# Altium PCB PCB_Robo_Hand.PcbDoc
Units mil, origin at the board's own origin, x right, y up, seen from the top; angles counter-clockwise.
Board outline 3800 x 3700 mil, 2 copper layers (Top Layer, Bottom Layer), stack 65.792 mil thick; 20 components, 26 nets, 130 pads, 44 vias.
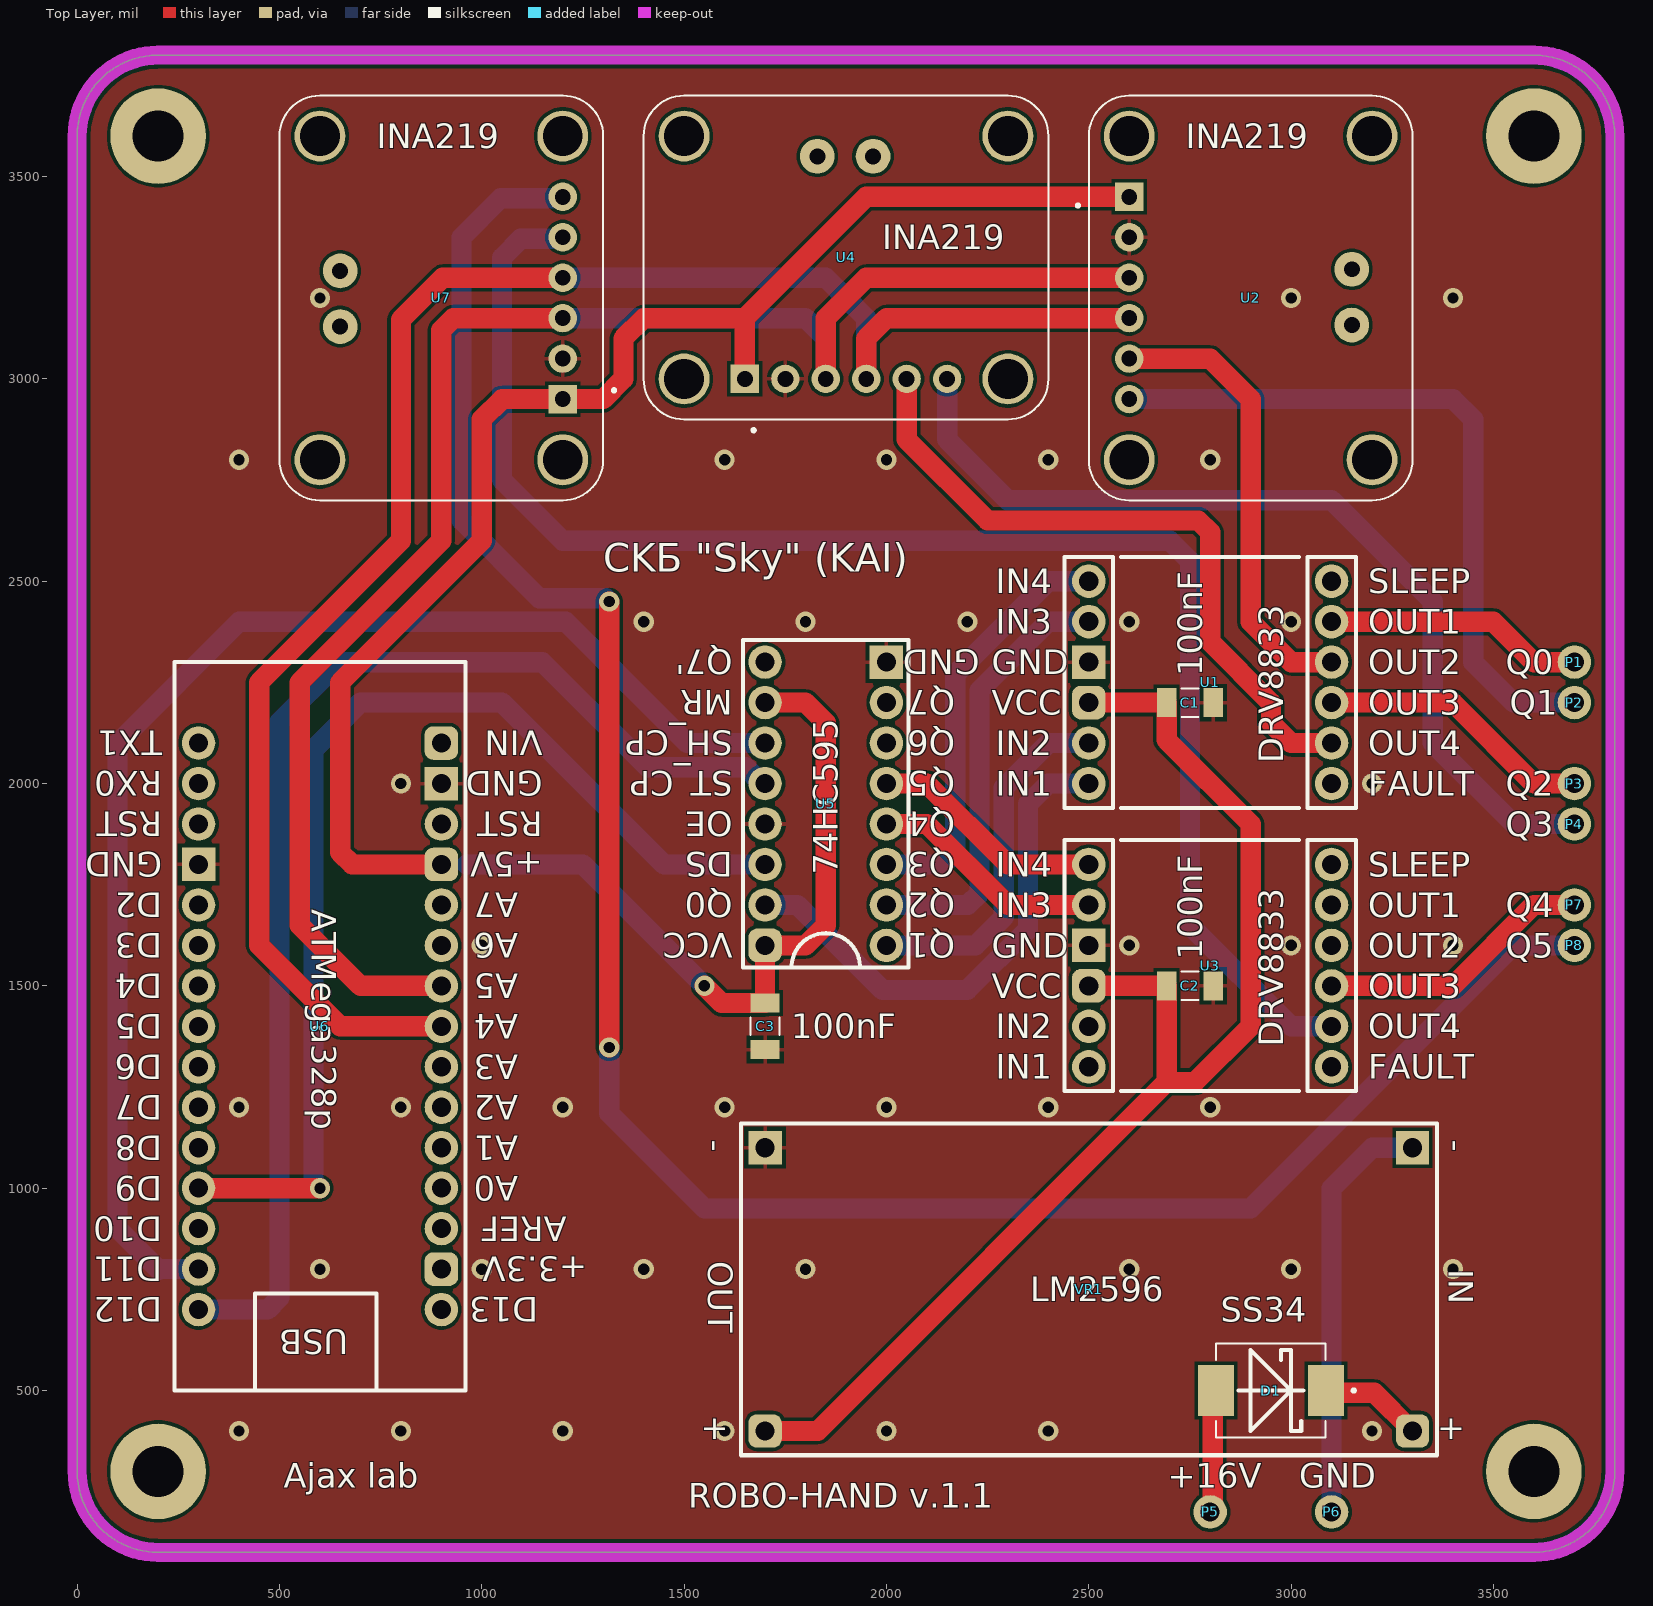
[diagram p0: Top Layer view]
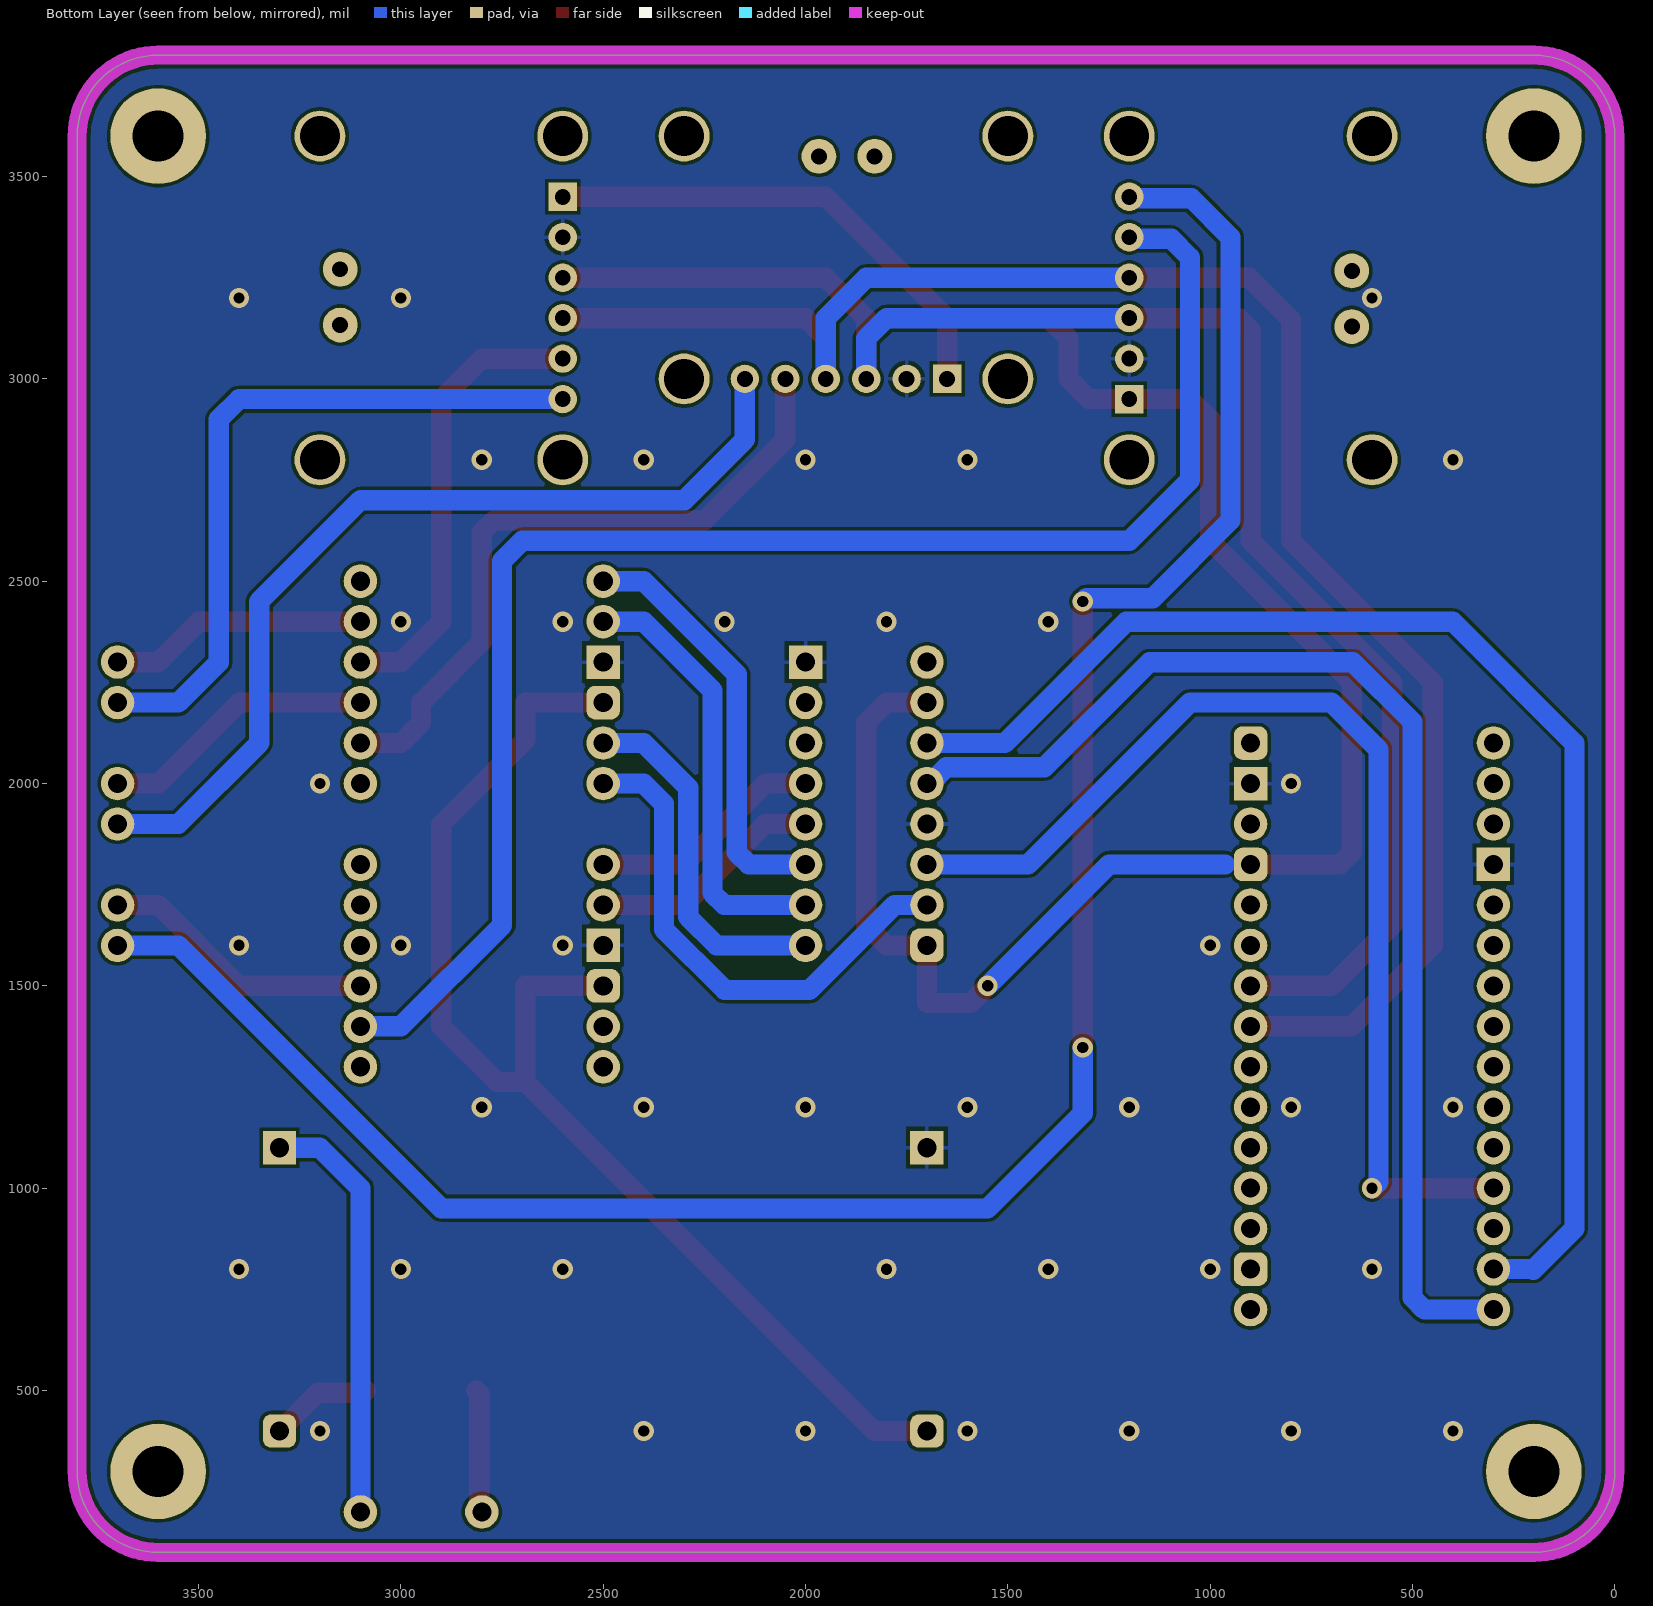
[diagram p1: Bottom Layer view, seen from below]
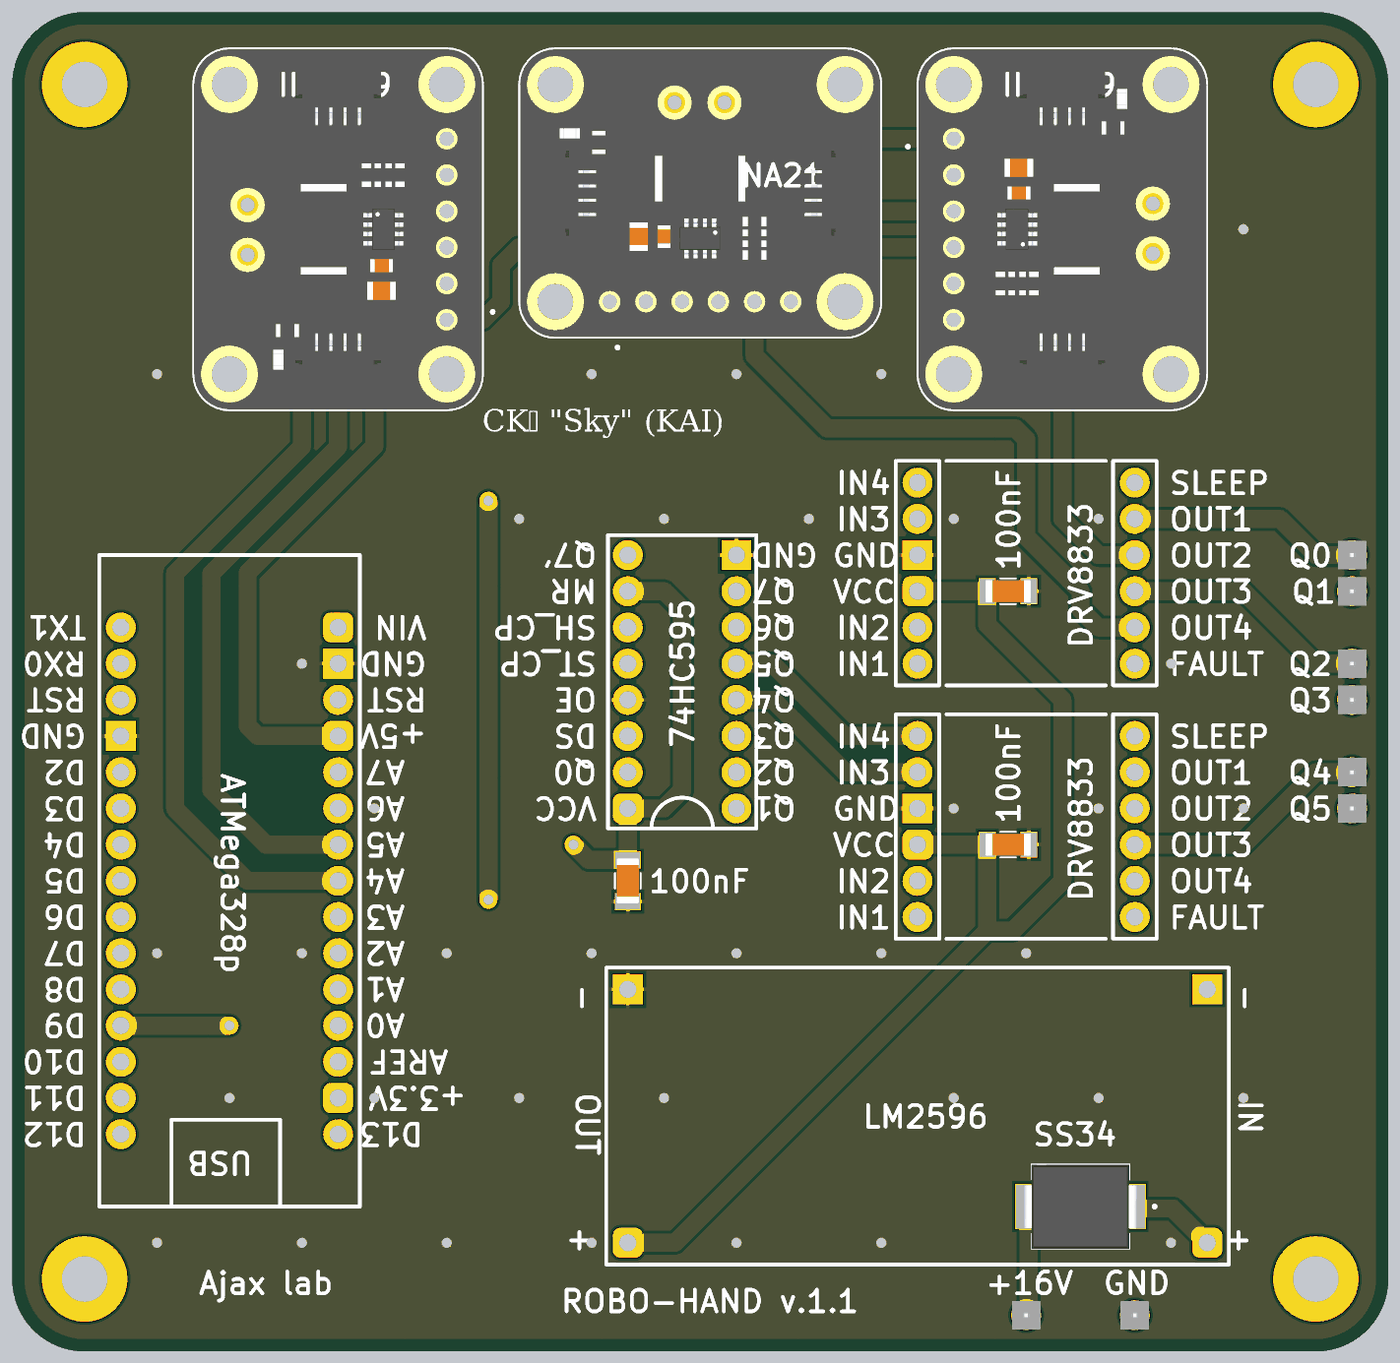
[diagram p2: 3D render of the assembled board from above, using the file's embedded part models]

## Layer stack, top to bottom
Top Solder: solder mask 0.4, Solder Resist, Dk 3.5
Top Layer: signal copper 1.4
Dielectric 1: dielectric 62.9921, FR-4, Dk 4.8
Bottom Layer: signal copper 1.4
Bottom Solder: solder mask 0.4, Solder Resist, Dk 3.5

## Board outline
0,300 0,3600 cw(c200,3600) 200,3800 3600,3800 cw(c3600,3600) 3800,3600 3800,300 cw(c3600,300) 3600,100 200,100 cw(c200,300)

## Design rules (kind name [scope] priority, off if disabled: settings)
AssemblyTestPointUsage [All] p1: isadvanced=TRUE
AssemblyTestpoint [All] p1: isadvanced=TRUE testpointundercomponent=TRUE minsize=40 maxsize=100 preferedsize=60 minholesize=0 maxholesize=40 preferedholesize=32 testpointgrid=1 usegrid=TRUE gridtolerance=0.01 allowsidetop=TRUE allowsidebottom=TRUE
Clearance Clearance_1 [OnMid vs OnMid] p1: gap=8 ignorepadtopadclearanceinfootprint=FALSE sourcerule=50 cellrowname=All cellrowtype=0 cellcolname=All cellcoltype=0 innerlayers=TRUE
Clearance Clearance_2 [(ExistsOnLayer('Top Layer') Or ExistsOnLayer('Bottom Layer')) vs (ExistsOnLayer('Top Layer') Or ExistsOnLayer('Bottom Layer'))] p2: gap=8 ignorepadtopadclearanceinfootprint=FALSE sourcerule=50 cellrowname=All cellrowtype=0 cellcolname=All cellcoltype=0 outerlayers=TRUE
Clearance [All] p3: gap=10 ignorepadtopadclearanceinfootprint=FALSE ismatrix=TRUE miname0="All Differential Pairs" mitype0=4
ComponentClearance ComponentClearance_1 [All] p1: isadvanced=TRUE gap=0 collisioncheckmode=3 verticalgap=10 showdistances=FALSE
FabricationTestPointUsage [All] p1: isadvanced=TRUE valid=0 allowmultiple=FALSE
FabricationTestpoint [All] p1: isadvanced=TRUE side=3 testpointundercomponent=TRUE minsize=40 maxsize=100 preferedsize=60 minholesize=0 maxholesize=40 preferedholesize=32 testpointgrid=1 allowsidetop=TRUE allowsidebottom=TRUE usegrid=TRUE gridtolerance=0.01
FanoutControl Fanout_BGA [IsBGA] p1: isadvanced=TRUE bgadir=Out bgaviamode=Centered fanoutstyle=Auto fanoutdirection=Alternating viagrid=1 // Fanout_BGA (Default Rule)
FanoutControl Fanout_LCC [IsLCC] p2: isadvanced=TRUE bgadir=Out bgaviamode=Centered fanoutstyle=Auto fanoutdirection=Alternating viagrid=1 // Fanout_LCC (Default Rule)
FanoutControl Fanout_SOIC [IsSOIC] p3: isadvanced=TRUE bgadir=Out bgaviamode=Centered fanoutstyle=Auto fanoutdirection=Alternating viagrid=1 // Fanout_SOIC (Default Rule)
FanoutControl Fanout_Small [(CompPinCount < 5)] p4: isadvanced=TRUE bgadir=Out bgaviamode=Centered fanoutstyle=Auto fanoutdirection=OutThenIn viagrid=1 // Fanout_Small (Default Rule)
FanoutControl Fanout_Default [All] p5: isadvanced=TRUE bgadir=Out bgaviamode=Centered fanoutstyle=Auto fanoutdirection=Alternating viagrid=1 // Fanout_Default (Default Rule)
Height [All] p1: isadvanced=TRUE minheight=0 maxheight=1000 prefheight=500
HoleSize [All] p1: isadvanced=TRUE absolutevalues=TRUE maxlimit=125.98 minlimit=1 maxpercent=80.000 minpercent=20.000
HoleToHoleClearance [All] p1: isadvanced=TRUE gap=10 allowstackedmicrovias=TRUE
LayerPairs [All] p1: isadvanced=TRUE enforce=TRUE
MinimumSolderMaskSliver [All] p1: isadvanced=TRUE minsoldermaskwidth=10
NetAntennae [All] p1: isadvanced=TRUE netantennaetolerance=0
PasteMaskExpansion [All] p1: isadvanced=TRUE expansion=-1.97
PlaneClearance [All] p1: isadvanced=TRUE clearance=20
PlaneConnect [All] p1: isadvanced=TRUE planeconnectstyle=Relief reliefexpansion=20 reliefentries=4 reliefconductorwidth=10 reliefairgap=20
PolygonConnect [All] p1: connectstyle=Relief reliefconductorwidth=10 reliefentries=4 polygonreliefangle="90 Angle" airgapwidth=10
RoutingCorners [All] p1: isadvanced=TRUE cornerstyle=45-Degree minsetback=100 maxsetback=100
RoutingPriority [All] p1: isadvanced=TRUE routingpriority=0
RoutingVias [All] p1: holewidth=28 width=50 viastyle="Through Hole" minholewidth=28 minwidth=50 maxholewidth=28 maxwidth=50
ShortCircuit [All] p1: isadvanced=TRUE allowed=FALSE
SilkToSilkClearance [All] p1: isadvanced=TRUE silktosilkclearance=5
SilkToSolderMaskClearance [IsPad] p1: isadvanced=TRUE minsilkscreentomaskgap=5 clearancetoexposedcopper=TRUE
SolderMaskExpansion [All] p1: isadvanced=TRUE expansion=3 istentingtop=FALSE
SupplyNets "Schematic Supply Nets_13" [InNet('SCL')] p1: isadvanced=TRUE voltage=0.000
SupplyNets "Schematic Supply Nets_12" [InNet('SDA')] p2: isadvanced=TRUE voltage=0.000
SupplyNets "Schematic Supply Nets_11" [InNet('+3V')] p3: isadvanced=TRUE voltage=0.000
SupplyNets "Schematic Supply Nets_10" [InNet('GND')] p4: isadvanced=TRUE voltage=0.000
SupplyNets "Schematic Supply Nets_9" [InNet('+5')] p5: isadvanced=TRUE voltage=0.000
SupplyNets "Schematic Supply Nets_8" [InNet('Q5')] p6: isadvanced=TRUE voltage=0.000
SupplyNets "Schematic Supply Nets_7" [InNet('SH_CP')] p7: isadvanced=TRUE voltage=0.000
SupplyNets "Schematic Supply Nets_6" [InNet('Q0')] p8: isadvanced=TRUE voltage=0.000
SupplyNets "Schematic Supply Nets_5" [InNet('Q3')] p9: isadvanced=TRUE voltage=0.000
SupplyNets "Schematic Supply Nets_4" [InNet('DS')] p10: isadvanced=TRUE voltage=0.000
SupplyNets "Schematic Supply Nets_3" [InNet('ST_CP')] p11: isadvanced=TRUE voltage=0.000
SupplyNets "Schematic Supply Nets_2" [InNet('Q1')] p12: isadvanced=TRUE voltage=0.000
SupplyNets "Schematic Supply Nets_1" [InNet('Q4')] p13: isadvanced=TRUE voltage=0.000
SupplyNets "Schematic Supply Nets" [InNet('Q2')] p14: isadvanced=TRUE voltage=0.000
UnRoutedNet [All] p1: isadvanced=TRUE
UnpouredPolygon [All] p1: isadvanced=TRUE
Width [All] p1 off: maxlimit=10 minlimit=10 preferedwidth=10
4 further rules are at their usual default settings.

## Classes and differential pairs
component class Sheet_Robo_Hand_main: C1 C2 C3 D1 P1 P3 P5 P6 P7 U1 U2 U3 U4 U5 U6 U7 VR1

## Components (designator, comment, footprint, x,y, rotation, side; value= is the part's Value field where it differs from the comment)
C1 "100nF" CAPC3216X180N 2750,2200 r180 top
C2 "100nF" CAPC3216X180N 2750,1500 r0 top
C3 "100nF" CAPC3216X180N 1700,1400 r90 top
D1 "SS34" DIOM7959X265N 2950,500 r180 top
P1 "Q0" PCB_Pin_1 3700,2300 r0 top
P2 "Q1" PCB_Pin_1 3700,2200 r0 top
P3 "Q2" PCB_Pin_1 3700,2000 r0 top
P4 "Q3" PCB_Pin_1 3700,1900 r0 top
P5 "+16V" PCB_Pin_1 2800,200 r0 top
P6 "GND" PCB_Pin_1 3100,200 r0 top
P7 "Q4" PCB_Pin_1 3700,1700 r0 top
P8 "Q5" PCB_Pin_1 3700,1600 r0 top
U1 "DRV8833" PCB_DRV8833 2400,1900 r0 top
U2 "INA219" MODULE_INA219 2900,3200 r270 top
U3 "DRV8833" PCB_DRV8833 2400,1200 r0 top
U4 "INA219" MODULE_INA219 1900,3300 r0 top
U5 "74HC595" PCB_74HC595_Footprint 2100,2400 r180 top
U6 "ATMega328p" PCB_ATMega328p 1000,2200 r180 top
U7 "INA219" MODULE_INA219 900,3200 r90 top
VR1 "LM2596" "DC-DC Step-Down Footprint" 3400,1200 r180 top

## Footprints (in the part's own frame and the unit in brackets; to place one, negate y for a bottom-side part, rotate by r counter-clockwise, add the part's x,y. Pads: shape width x height; smd on the part's side, far side on the other; paste and mask are expansions set on the pad)
CAPC3216X180N [mm]
  rect 1.2x1.82 smd: 1(-1.46,0) 2(1.46,0)
  silkscreen extent -0.54,-0.9 0.54,0.9, body extent -1.6,-0.8 1.6,0.8, height 1.8
"DC-DC Step-Down Footprint" [mm]
  rect 2.1x2.1 hole 1.2: 0(2.54,2.54) 3(43.18,2.54)
  rrect50% 2.1x2.1 hole 1.2: 1(2.54,20.32) 2(43.18,20.32)
  silkscreen extent 1.02,1.02 44.7,21.84
DIOM7959X265N [mm]
  rect 2.25x3.18 smd: A(3.455,0) C(-3.455,0)
  silkscreen extent -5.3,-2.95 3.44,2.95, body extent -3.98,-2.95 3.98,2.95, height 2.65
MODULE_INA219 [mm]
  rect 1.778x1.778 / inner round 1.778 / far side rect 1.778x1.778 hole 1: 1(-6.35,-7.62)
  round 1.778 hole 1: 2(-3.81,-7.62) 3(-1.27,-7.62) 4(1.27,-7.62) 5(3.81,-7.62) 6(6.35,-7.62)
  round 3.2 hole 2.5: SH1(-10.16,7.62) SH2(10.16,7.62) SH3(-10.16,-7.62) SH4(10.16,-7.62)
  round 2.184 hole 1: VIN+(1.7,6.35) VIN-(-1.8,6.35)
  silkscreen extent -12.7,-10.94 12.7,10.16, body extent -12.7,-10.16 12.7,10.16, height 2.95
PCB_74HC595_Footprint [mm]
  rect 2.1x2.1 hole 1.2: 0(2.54,2.54)
  round 2.1 hole 1.2: 1(2.54,5.08) 2(2.54,7.62) 3(2.54,10.16) 4(2.54,12.7) 5(2.54,15.24) 6(2.54,17.78) 7(2.54,20.32) 9(10.16,17.78) 10(10.16,15.24) 11(10.16,12.7) 12(10.16,10.16) 13(10.16,7.62) 14(10.16,5.08) 15(10.16,2.54)
  rrect50% 2.1x2.1 hole 1.2: 8(10.16,20.32)
  silkscreen extent 1.14,1.14 11.56,21.72
PCB_ATMega328p [mm] "Arduino Nano"
  rrect50% 2.1x2.1 hole 1.2: 0(2.54,2.54) 3(2.54,10.16) 13(2.54,35.56)
  rect 2.1x2.1 hole 1.2: 1(2.54,5.08) 26(17.78,10.16)
  round 2.1 hole 1.2: 2(2.54,7.62) 4(2.54,12.7) 5(2.54,15.24) 6(2.54,17.78) 7(2.54,20.32) 8(2.54,22.86) 9(2.54,25.4) 10(2.54,27.94) 11(2.54,30.48) 12(2.54,33.02) 14(2.54,38.1) 15(17.78,38.1) 16(17.78,35.56) 17(17.78,33.02) 18(17.78,30.48) 19(17.78,27.94) 20(17.78,25.4) 21(17.78,22.86) 22(17.78,20.32) 23(17.78,17.78) 24(17.78,15.24) 25(17.78,12.7) 27(17.78,7.62) 28(17.78,5.08) 29(17.78,2.54)
  silkscreen extent 1.02,-2.54 19.3,43.18
PCB_DRV8833 [mm]
  round 2.1 hole 1.2: 0(2.54,2.54) 1(2.54,5.08) 4(2.54,12.7) 5(2.54,15.24) 6(17.78,15.24) 7(17.78,12.7) 8(17.78,10.16) 9(17.78,7.62) 10(17.78,5.08) 11(17.78,2.54)
  rrect50% 2.1x2.1 hole 1.2: 2(2.54,7.62)
  rect 2.1x2.1 hole 1.2: 3(2.54,10.16)
  silkscreen extent 1.02,1.02 19.3,16.76
PCB_Pin_1 [mm]
  round 2.1 hole 1.2: 0(0,0)
  body extent -1,-1 1,1, height 4.55

## Part data
C1 C2 C3: library part C_1206_100nF, "Ceramic capacitor SMD 1206 100 nF 50 V 10 % Samsung Electro-Mechanics CL31B104KBCNNNC 4000 pc(s)", Package="1206 Samsung", Availability="In Stock", Check_prices=https://www.snapeda.com/parts/CL31B104KBCNNNC/Samsung+Electro-Mechanics/view-part/?ref=eda, MF="Samsung Electro-Mechanics", MP=CL31B104KBCNNNC, Price=None, Purchase-URL=https://pricing.snapeda.com/search/part/CL31B104KBCNNNC/?ref=eda, SnapEDA_Link=https://www.snapeda.com/parts/CL31B104KBCNNNC/Samsung+Electro-Mechanics/view-part/?ref=snap
D1: library part Diode_SS34, "SS34 - діод Шоттки", Package="SMC-2 ON Semiconductor", Check_prices=https://www.snapeda.com/parts/SS34/Onsemi/view-part/?ref=eda, MF=onsemi, MP=SS34, SnapEDA_Link=https://www.snapeda.com/parts/SS34/Onsemi/view-part/?ref=snap
P1 P2 P3 P4 P5 P6 P7 P8: library part PIN_1
U1 U3: library part "Motor Driver", "Драйвер крокового/колекторних двигунів DRV8833"
U2 U4 U7: "INA219 High Side DC Current Sensor Breakout - 26V Â±3.2A Max", Package="NON-STANDARD-8 ADAFRUIT", Check_prices=https://www.snapeda.com/parts/INA219%20High%20Side%20DC%20Current%20Sensor%20Breakout%20-%2026V%20%C2%B13.2A%20Max%20-%20STEMMA%20QT/Adafruit+Industries/view-part/?ref=eda, MF="Adafruit Industries", MP="INA219 High Side DC Current Sensor Breakout - 26V Â±3.2A Max - STEMMA QT", SnapEDA_Link=https://www.snapeda.com/parts/INA219%20High%20Side%20DC%20Current%20Sensor%20Breakout%20-%2026V%20%C2%B13.2A%20Max%20-%20STEMMA%20QT/Adafruit+Industries/view-part/?ref=snap
U5: library part SCS-16, "SN74HC595N - вихідний зсувний регістр 74HC595"
U6: library part "Arduino Nano", "DCCduino Nano CH340 - аналог Arduino Nano v3.0 TYPE C"
VR1: library part "DC-DC Step-Down", "DC-DC конвертер знижуючий 4.5...40В на 1.5...35В на LM2596"

## Free pads (board coordinates)
  round 236.22 hole 125.98: 0(200,300) 1(200,3600) 2(3600,3600) 3(3600,300)

## Via types
v1: diameter 50, hole 28, Top Layer to Bottom Layer, tented both sides, 40 vias
v2: diameter 50, hole 28, Top Layer to Bottom Layer, 4 vias

## Nets (pads, with @x,y where several pads share a name; then routed paths per layer and width w, separated by ;. In a path a pad name is that pad's centre, name@x,y a point inside that pad or via, vN(x,y) a via of type N, cw(c..) or ccw(c..) an arc to the next point about the centre after c; other vN are vias at no path point)
+3V: C1.2 C2.1 U1.2 U3.2 VR1.2 | length 3122.7
  Top Layer w50: VR1.2 1830,400 2692.52,1262.52 ; U3.2 C2.1 2692.52,1262.52 ; U1.2 C1.2 2692.52,2107.48 2900,1900 2900,1400 2762.52,1262.52 2692.52,1262.52
+5: C3.2 U2.1 U4.1 U5.8 U5.14 U6.3 U7.1 | length 5377.4
  Top Layer w50: U6.3 679.29,1800 650,1829.29 650,2250 1000,2600 1000,2900 1050,2950 U7.1 1300,2950 1350,3000 1350,3100 1400,3150 1650,3150 ; v2(1550,1500) 1592.52,1457.48 C3.2 U5.8 1800,1600 1850,1650 1850,2150 1800,2200 U5.14 ; U4.1 1650,3150 ; U2.1 1950,3450 1650,3150
  Bottom Layer w50: 962.62,1800 1250,1800 v2(1550,1500)
DS: U5.10 U6.18 | length 2720.4
  Top Layer w50: U6.18 v2(600,1000)
  Bottom Layer w50: v2(600,1000) 584,1016 584,2084 700,2200 1050,2200 1450,1800 U5.10
GND: C1.1 C2.2 C3.1 U1.3 U2.2 U3.3 U4.2 U5.0 U5.11 U6.1 U6.26 U7.2 VR1.3
  other v1: 400,400 800,400 1200,400 1600,400 2000,400 2400,400 3200,400 600,800 1000,800 1400,800 1800,800 2600,800 3000,800 3400,800 400,1200 800,1200 1200,1200 1600,1200 2000,1200 2400,1200 2800,1200 1000,1600 2600,1600 3000,1600 3400,1600 800,2000 3200,2000 1400,2400 1800,2400 2200,2400 2600,2400 3000,2400 400,2800 1600,2800 2000,2800 2400,2800 2800,2800 600,3200 3000,3200 3400,3200
GND_16V: P6.0 VR1.0 | length 1041.4
  Bottom Layer w50: P6.0 3100,1000 3200,1100 VR1.0
NetP1_0: P1.0 U1.7 | length 641.4
  Top Layer w50: U1.7 3500,2400 3600,2300 P1.0
NetP2_0: P2.0 U2.6 | length 1762.1
  Bottom Layer w50: U2.6 3400,2950 3450,2900 3450,2300 3550,2200 P2.0
NetP3_0: P3.0 U1.9 | length 682.8
  Top Layer w50: U1.9 3400,2200 3600,2000 P3.0
NetP4_0: P4.0 U4.6 | length 2298.5
  Bottom Layer w50: U4.6 2150,2850 2300,2700 3100,2700 3350,2450 3350,2100 3550,1900 P4.0
NetP7_0: P7.0 U3.9 | length 682.8
  Top Layer w50: U3.9 3400,1500 3600,1700 P7.0
NetP8_0: P8.0 U7.6 | length 5455.7
  Top Layer w50: v2(1314.7,2450) 1315,2449.7 v2(1315,1347.71)
  Bottom Layer w50: U7.6 1196.17,3446.17 1046.17,3446.17 950,3350 950,2650 1142,2458 1306.7,2458 v2(1314.7,2450) ; v2(1315,1347.71) 1315,1185 1550,950 2900,950 3550,1600 P8.0
NetU1_8: U1.8 U2.5 | length 1132.8
  Top Layer w50: U2.5 2800,3050 2900,2950 2900,2400 3000,2300 U1.8
NetU1_10: U1.10 U4.5 | length 1698.5
  Top Layer w50: U4.5 2050,2850 2250,2650 2770.71,2650 2800,2620.71 2800,2350 2950,2200 2950,2150 3000,2100 U1.10
NetU3_10: U3.10 U7.5 | length 3857.1
  Bottom Layer w50: U7.5 1196.17,3346.17 1096.17,3346.17 1050,3300 1050,2750 1200,2600 2700,2600 2750,2550 2750,1650 3000,1400 U3.10
Q0: U1.0 U5.9 | length 1279.8
  Bottom Layer w50: U5.9 1780,1700 1990,1490 2200,1490 2350,1640 2350,1950 2400,2000 U1.0
Q1: U1.1 U5.7 | length 894.6
  Bottom Layer w50: U5.7 2220,1600 2290,1670 2290,1990 2400,2100 U1.1
Q2: U1.4 U5.6 | length 1083.3
  Bottom Layer w50: U5.6 2200.71,1700 2230,1729.29 2230,2230 2400,2400 U1.4
Q3: U1.5 U5.5 | length 1048.1
  Bottom Layer w50: U5.5 2140.71,1800 2170,1829.29 2170,2270 2400,2500 U1.5
Q4: U3.4 U5.4 | length 582.8
  Top Layer w50: U5.4 2100,1900 2300,1700 U3.4
Q5: U3.5 U5.3 | length 582.8
  Top Layer w50: U5.3 2100,2000 2300,1800 U3.5
SCL: U2.3 U4.3 U6.6 U7.3 | length 4052.1
  Top Layer w50: U6.6 700,1500 550,1650 550,2250 900,2600 900,3120.71 929.29,3150 U7.3 ; U4.3 1850,3150 1950,3250 U2.3
  Bottom Layer w50: U7.3 1800,3150 1850,3100 U4.3
SDA: U2.4 U4.4 U6.7 U7.4 | length 4379.2
  Top Layer w50: U6.7 650,1400 450,1600 450,2250 800,2600 800,3146.27 903.73,3250 U7.4 ; U4.4 1950,3100 2000,3150 U2.4
  Bottom Layer w50: U7.4 1850,3250 1950,3150 U4.4
SH_CP: U5.13 U6.16 | length 3291.5
  Bottom Layer w50: U6.16 203.68,800 201.84,798.16 100,900 100,2100 400,2400 1207.96,2400 1507.96,2100 U5.13
SS34_16V: D1.C VR1.1 | length 255.4
  Top Layer w50: D1.C 3091.34,494.69 3205.32,494.69 VR1.1
ST_CP: U5.12 U6.15 | length 3020.8
  Bottom Layer w50: U6.15 470.71,700 500,729.29 500,2152.73 647.27,2300 1150,2300 1410,2040 1652.04,2040 1692.04,2000 U5.12
VCC_16V: D1.A P5.0 | length 305.8
  Top Layer w50: P5.0 2806.25,206.25 2806.25,492.28 D1.A
pads on no net: U1.6 U1.11 U2.SH1 U2.SH2 U2.SH3 U2.SH4 U2.VIN+ U2.VIN- U3.0 U3.1 U3.6 U3.7 U3.8 U3.11 U4.SH1 U4.SH2 U4.SH3 U4.SH4 U4.VIN+ U4.VIN- U5.1 U5.2 U5.15 U6.0 U6.2 U6.4 U6.5 U6.8 U6.9 U6.10 U6.11 U6.12 U6.13 U6.14 U6.17 U6.19 U6.20 U6.21 U6.22 U6.23 U6.24 U6.25 U6.27 U6.28 U6.29 U7.SH1 U7.SH2 U7.SH3 U7.SH4 U7.VIN+ U7.VIN-

## Polygon pours and split planes (outlines as drawn)
GND on Bottom Layer "GND_L02_P001" (solid, remove dead copper, pour order 1): 0,3800 3800,3800 3800,100 0,100
GND on Top Layer "GND_L01_P000" (solid, remove dead copper, pour order 0): 0,3800 3800,3800 3800,100 0,100

## Keep-outs
Keep-Out Layer:
  lines w3.94: 0,2800 0,300 ; 0,3600 0,300 ; 0,300 ccw(c200,300) 200,100 ; 0,300 ccw(c200,300) 200,100 ; 200,100 3600,100 ; 200,100 3600,100 ; 3600,100 ccw(c3600,300) 3800,300 ; 3600,100 ccw(c3600,300) 3800,300 ; 3800,300 3800,3600 3800,300
  lines w10: 0,3600 cw(c200,3600) 200,3800
  lines w47.24: 0,300 ccw(c200,300) 200,100 3600,100 ccw(c3600,300) 3800,300 3800,3600 ccw(c3600,3600) 3600,3800 200,3800 ccw(c200,3600) 0,3600 0,300

## Silkscreen, mask and mechanical layers (free items; w line width, h text height)
Top Overlay:
  text "CKБ \"Sky\" (KAI)" at 1300,2500 h120
  text "Ajax lab" at 510,259.99 h60
  text "ROBO-HAND v.1.1" at 1510,210 h60
Mechanical 1:
  the board outline again, w10

## Text inside footprints (layer, text, board x,y; h text height)
U1: Top Overlay "FAULT" at 3190,1970 h60; Top Overlay "OUT4" at 3190,2070 h60; Top Overlay "OUT3" at 3190,2170 h60; Top Overlay "OUT2" at 3190,2270 h60; Top Overlay "OUT1" at 3190,2370 h60; Top Overlay "SLEEP" at 3190,2470 h60; Top Overlay "IN4" at 2270,2470 h60; Top Overlay "IN3" at 2270,2370 h60; Top Overlay "GND" at 2260,2270 h60; Top Overlay "VCC" at 2260,2170 h60; Top Overlay "IN2" at 2270,2070 h60; Top Overlay "IN1" at 2270,1970 h60
U3: Top Overlay "FAULT" at 3190,1270 h60; Top Overlay "OUT4" at 3190,1370 h60; Top Overlay "OUT3" at 3190,1470 h60; Top Overlay "OUT2" at 3190,1570 h60; Top Overlay "OUT1" at 3190,1670 h60; Top Overlay "SLEEP" at 3190,1770 h60; Top Overlay "IN4" at 2270,1770 h60; Top Overlay "IN3" at 2270,1670 h60; Top Overlay "GND" at 2260,1570 h60; Top Overlay "VCC" at 2260,1470 h60; Top Overlay "IN2" at 2270,1370 h60; Top Overlay "IN1" at 2270,1270 h60
U5: Top Overlay "Q7'" at 1620,2330 h60 r180; Top Overlay "MR" at 1620,2230 h60 r180; Top Overlay "SH_CP" at 1620,2130 h60 r180; Top Overlay "ST_CP" at 1620,2030 h60 r180; Top Overlay "OE" at 1620,1930 h60 r180; Top Overlay "DS" at 1620,1830 h60 r180; Top Overlay "Q0" at 1620,1730 h60 r180; Top Overlay "VCC" at 1620,1630 h60 r180; Top Overlay "GND" at 2230,2330 h60 r180; Top Overlay "Q7" at 2170,2230 h60 r180; Top Overlay "Q6" at 2170,2130 h60 r180; Top Overlay "Q5" at 2170,2030 h60 r180; Top Overlay "Q4" at 2170,1930 h60 r180; Top Overlay "Q3" at 2170,1830 h60 r180; Top Overlay "Q2" at 2170,1730 h60 r180; Top Overlay "Q1" at 2170,1630 h60 r180
U6: Top Overlay "USB" at 670,650 h60 r180; Top Overlay "TX1" at 210,2130 h60 r180; Top Overlay "RX0" at 210,2030 h60 r180; Top Overlay "RST" at 210,1930 h60 r180; Top Overlay "GND" at 210,1830 h60 r180; Top Overlay "D2" at 210,1730 h60 r180; Top Overlay "D3" at 210,1630 h60 r180; Top Overlay "D4" at 210,1530 h60 r180; Top Overlay "D5" at 210,1430 h60 r180; Top Overlay "D6" at 210,1330 h60 r180; Top Overlay "D7" at 210,1230 h60 r180; Top Overlay "D8" at 210,1130 h60 r180; Top Overlay "D9" at 210,1030 h60 r180; Top Overlay "D10" at 210,930 h60 r180; Top Overlay "D11" at 210,830 h60 r180; Top Overlay "D12" at 210,730 h60 r180; Top Overlay "VIN" at 1150,2130 h60 r180; Top Overlay "GND" at 1150,2030 h60 r180; Top Overlay "RST" at 1150,1930 h60 r180; Top Overlay "+5V" at 1150,1830 h60 r180; Top Overlay "A7" at 1090,1730 h60 r180; Top Overlay "A6" at 1090,1630 h60 r180; Top Overlay "A5" at 1090,1530 h60 r180; Top Overlay "A4" at 1090,1430 h60 r180; Top Overlay "A3" at 1090,1330 h60 r180; Top Overlay "A2" at 1090,1230 h60 r180; Top Overlay "A1" at 1090,1130 h60 r180; Top Overlay "A0" at 1090,1030 h60 r180; Top Overlay "AREF" at 1210,930 h60 r180; Top Overlay "+3.3V" at 1260,830 h60 r180; Top Overlay "D13" at 1140,730 h60 r180
VR1: Top Overlay "+" at 3430,430 h60 r180; Top Overlay "-" at 3380.01,1120 h60 r270; Top Overlay "-" at 1550.01,1120 h60 r270; Top Overlay "+" at 1610,430 h60 r180; Top Overlay "IN" at 3390,800 h60 r270; Top Overlay "OUT" at 1560,820 h60 r270